# Altium PCB go_sign.PcbDoc (part 2 of 3)
Units mm, origin at the board's own origin, x right, y up, seen from the top; angles counter-clockwise.
Board outline 188.34 x 188.34 mm, 2 copper layers (Top Layer, Bottom Layer); 124 components, 124 nets, 557 pads, 137 vias.
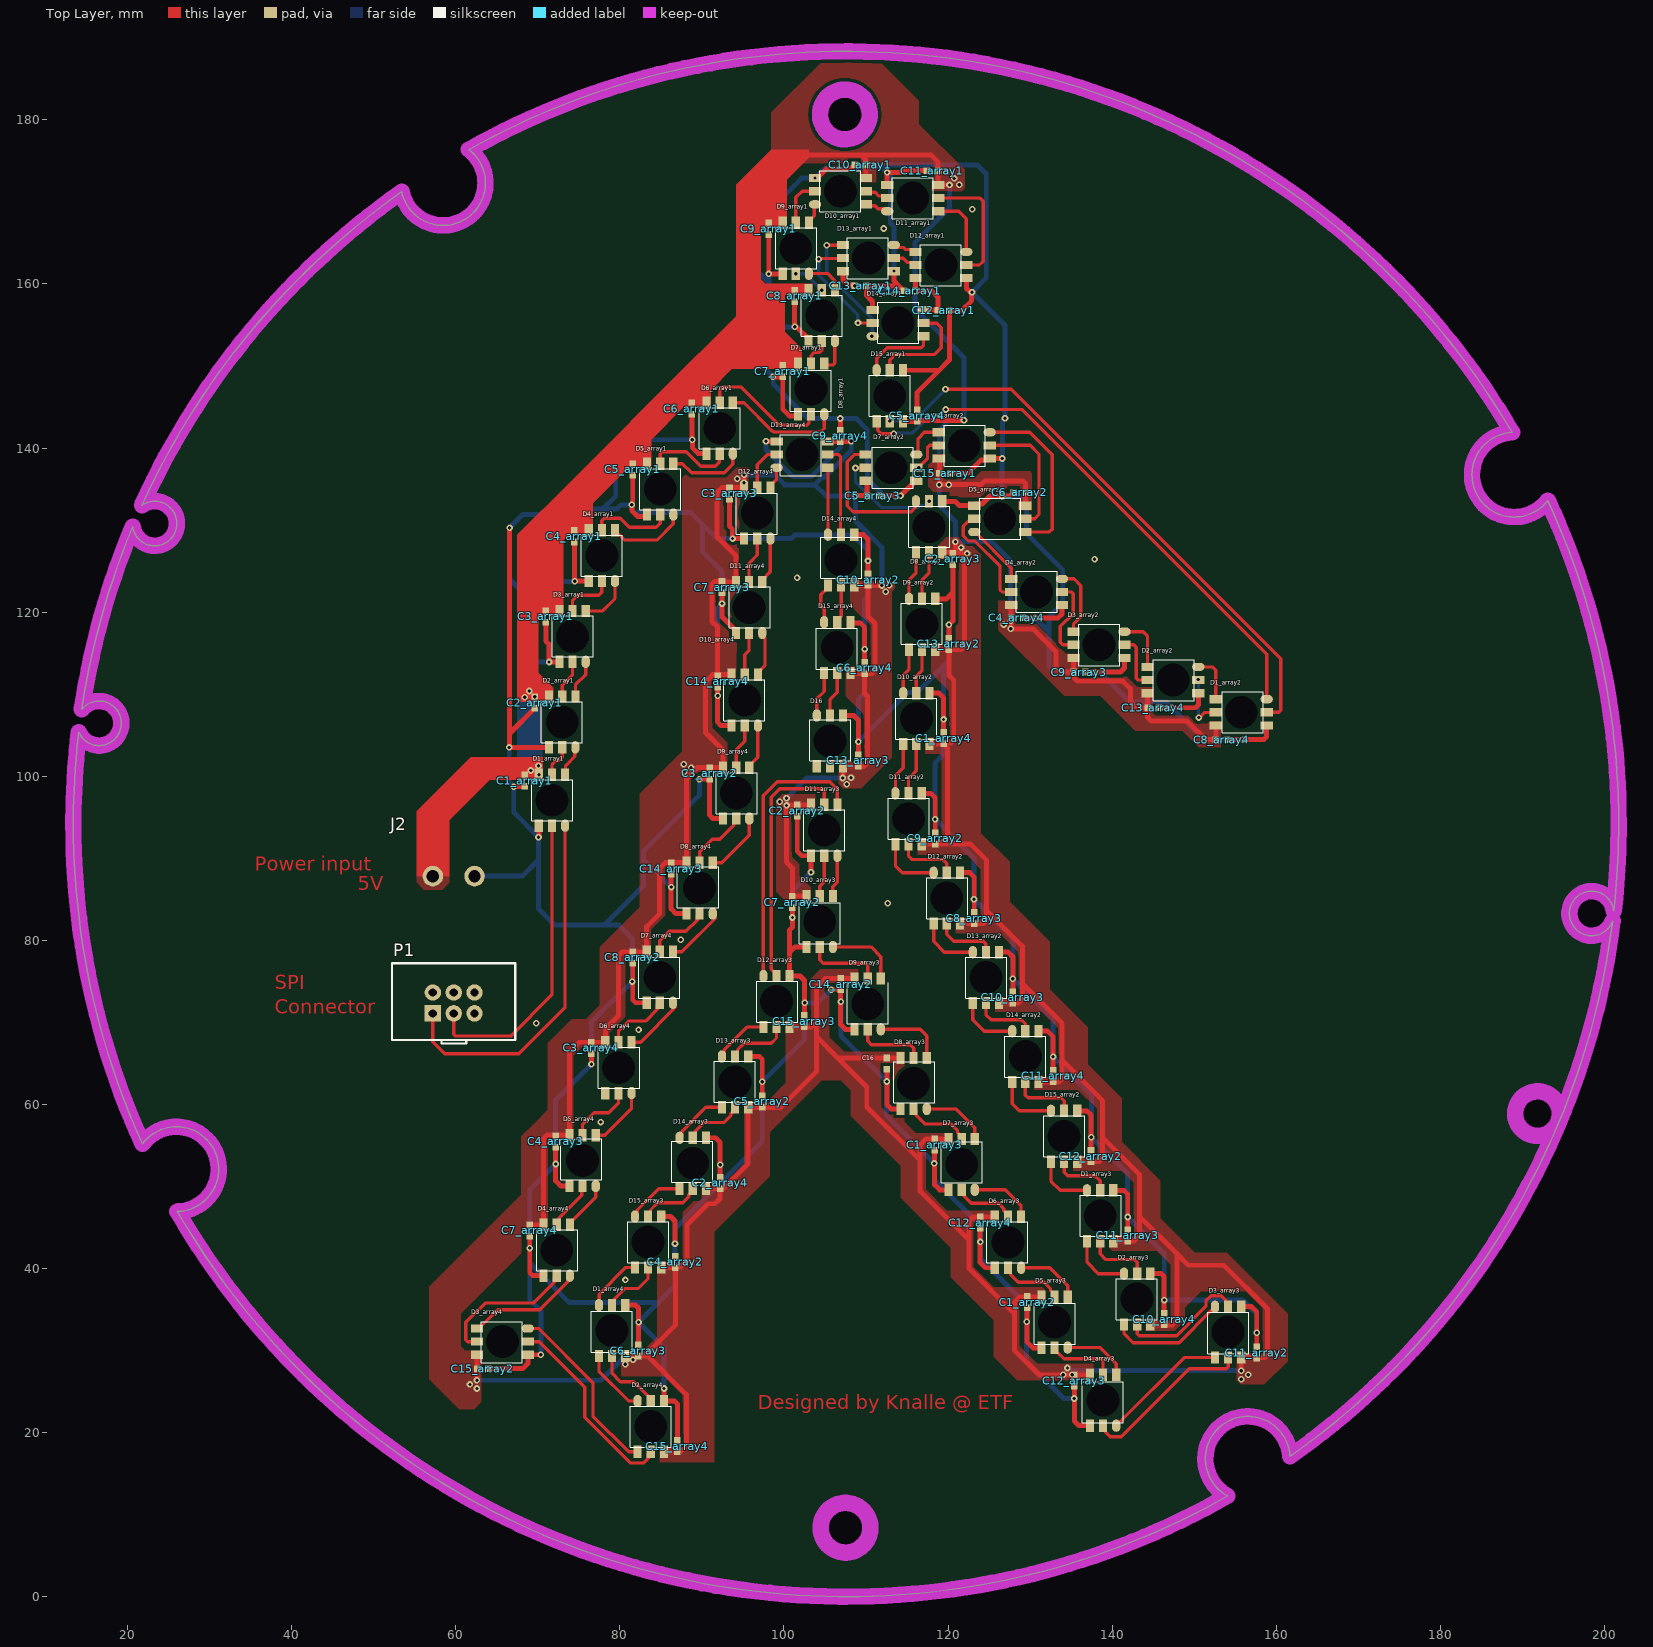
[diagram p0: Top Layer view]

## Via types
v1: diameter 0.8, hole 0.4, Top Layer to Bottom Layer, 137 vias

## Nets (pads, with @x,y where several pads share a name; then routed paths per layer and width w, separated by ;. In a path a pad name is that pad's centre, name@x,y a point inside that pad or via, vN(x,y) a via of type N, cw(c..) or ccw(c..) an arc to the next point about the centre after c; other vN are vias at no path point) (continued)
NetD1_array2_5: (continued)
  Bottom Layer w0.4: v1(150.509,111.784) 150.527,111.766 150.527,107.168 v1(150.546,107.15)